# Altium PCB BU01v1.2.PcbDoc
Units mil, origin at the board's own origin, x right, y up, seen from the top; angles counter-clockwise.
Board outline 1015 x 695 mil, 2 copper layers (Top Layer, Bottom Layer); 7 components, 21 nets, 49 pads, 3 vias.
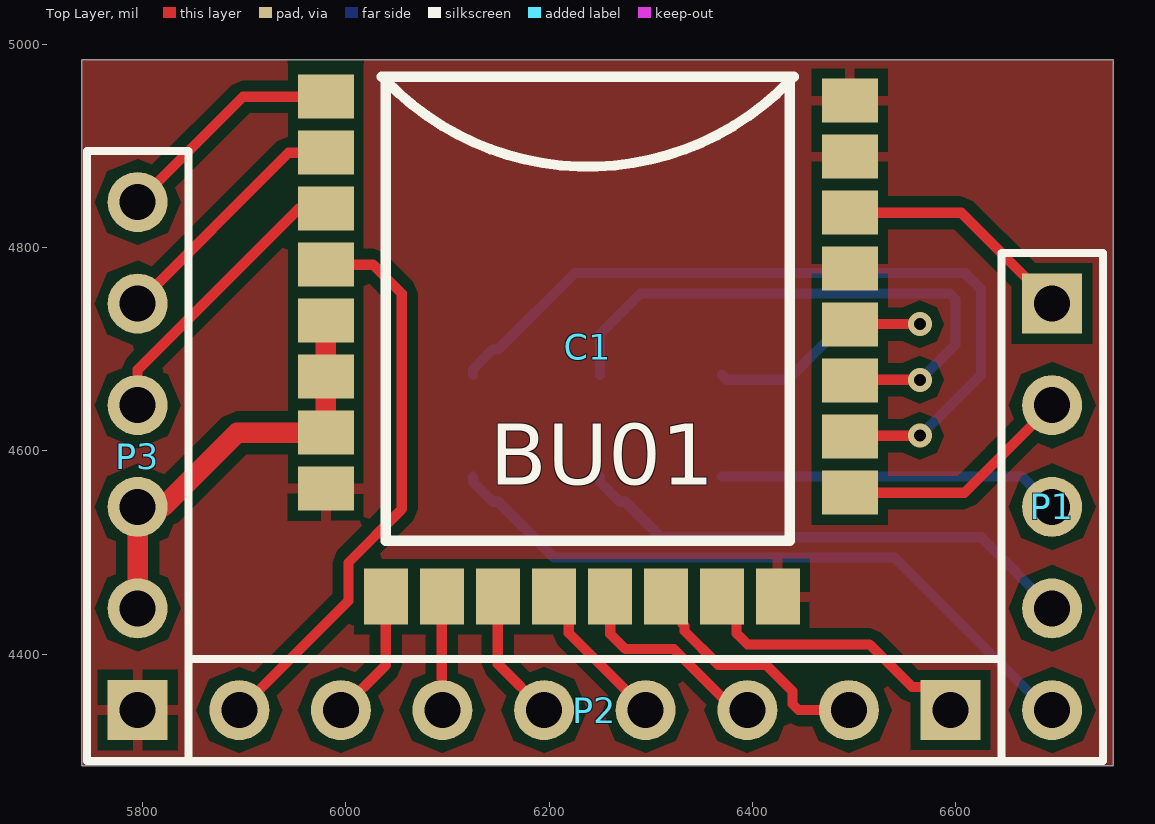
[diagram p0: Top Layer view]
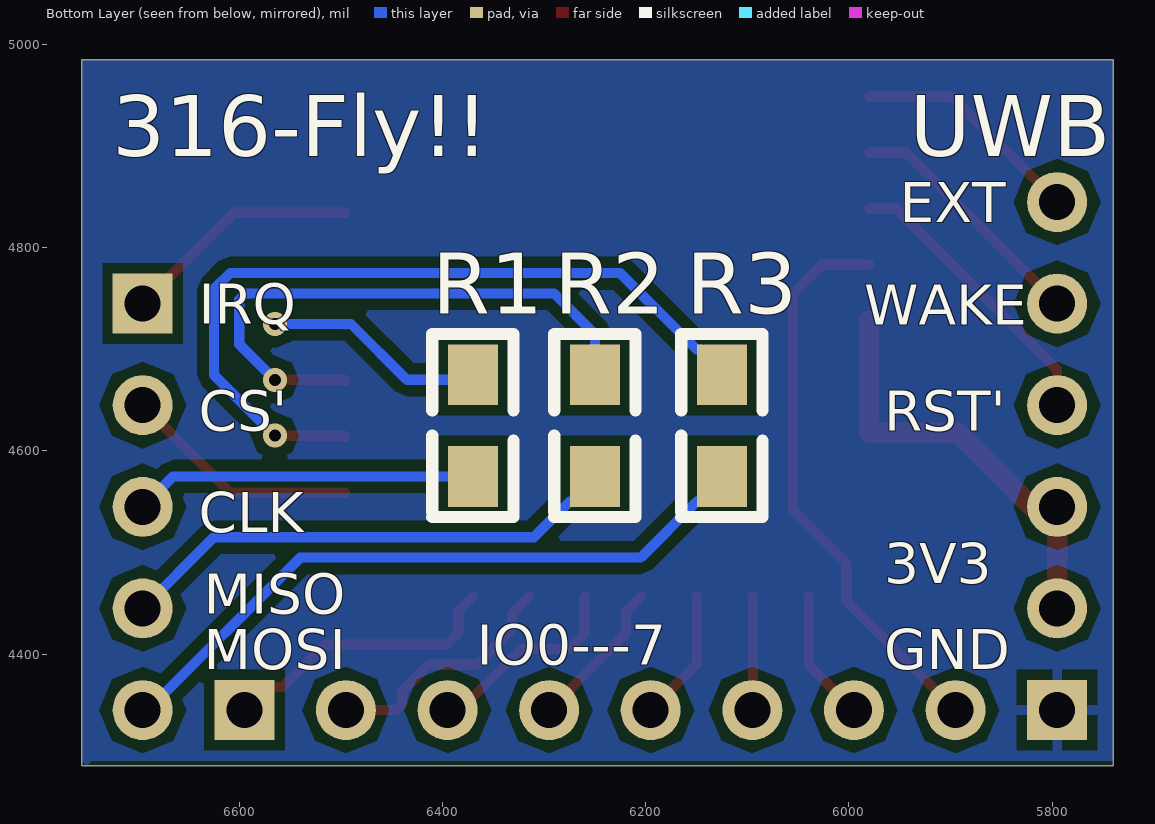
[diagram p1: Bottom Layer view, seen from below]

## Layer stack, top to bottom
Top Solder: solder mask 0.4, Solder Resist, Dk 3.5
Top Layer: signal copper 1.4
Dielectric 1: dielectric 12.6, FR-4, Dk 4.8
Bottom Layer: signal copper 1.4
Bottom Solder: solder mask 0.4, Solder Resist, Dk 3.5

## Board outline
5740,4290 5740,4985 6755,4985 6755,4290

## Design rules (kind name [scope] priority, off if disabled: settings)
Clearance [All] p1: gap=10
ComponentClearance [All] p1 off: gap=10 collisioncheckmode=3 verticalgap=10 showdistances=FALSE
PolygonConnect [All] p1: connectstyle=Relief reliefconductorwidth=10 reliefentries=4 polygonreliefangle="90 Angle" airgapwidth=10
RoutingVias [All] p1: holewidth=28 width=50 viastyle="Through Hole" minholewidth=28 minwidth=50 maxholewidth=28 maxwidth=50
SolderMaskExpansion [All] p1: expansion=4
Width [All] p1: maxlimit=30 minlimit=10 preferedwidth=10
29 further rules are at their usual default settings.

## Components (designator, comment, footprint, x,y, rotation, side; value= is the part's Value field where it differs from the comment)
C1 "BU01" BU01 6240,4925 r0 top
P1 "Header 5" HDR1X5 6695,4745 r270 top
P2 "Header 8" HDR1X8 6595,4345 r180 top
P3 "Header 6" HDR1X6 5795,4345 r90 top
R1 "Res Semi" 0805 6370,4675 r270 bottom
R2 "Res Semi" 0805 6250,4675 r270 bottom
R3 "Res Semi" 0805 6125,4675 r270 bottom

## Footprints (in the part's own frame and the unit in brackets; to place one, negate y for a bottom-side part, rotate by r counter-clockwise, add the part's x,y. Pads: shape width x height; smd on the part's side, far side on the other; paste and mask are expansions set on the pad)
0805 [mil]
  rect 60x49.21 smd: 1(0,0) 2(100,0)
  silkscreen extent -40,-40 140,40
BU01 [mm]
  rect 1.4x1.1 smd: 1(-6.6,0.6) 2(-6.6,-0.8) 3(-6.6,-2.2) 4(-6.6,-3.6) 5(-6.6,-5) 6(-6.6,-6.4) 7(-6.6,-7.8) 8(-6.6,-9.2) 17(6.5,-9.3) 18(6.5,-7.9) 19(6.5,-6.5) 20(6.5,-5.1) 21(6.5,-3.7) 22(6.5,-2.3) 23(6.5,-0.9) 24(6.5,0.5)
  rect 1.1x1.4 smd: 9(-5.1,-11.9) 10(-3.7,-11.9) 11(-2.3,-11.9) 12(-0.9,-11.9) 13(0.5,-11.9) 14(1.9,-11.9) 15(3.3,-11.9) 16(4.7,-11.9)
  silkscreen extent -5.2,-10.5 5.1,1.1
HDR1X5 [mm] "Connector; Header; 5 Position"
  rect 1.5x1.5 hole 0.9: 1(0,0)
  round 1.5 hole 0.9: 2(2.54,0) 3(5.08,0) 4(7.62,0) 5(10.16,0)
  silkscreen extent -1.27,-1.27 11.43,1.27
HDR1X6 [mm] "Connector; Header; 6 Position"
  rect 1.5x1.5 hole 0.9: 1(0,0)
  round 1.5 hole 0.9: 2(2.54,0) 3(5.08,0) 4(7.62,0) 5(10.16,0) 6(12.7,0)
  silkscreen extent -1.27,-1.27 13.97,1.27
HDR1X8 [mm] "Connector; Header; 8 Position"
  rect 1.5x1.5 hole 0.9: 1(0,0)
  round 1.5 hole 0.9: 2(2.54,0) 3(5.08,0) 4(7.62,0) 5(10.16,0) 6(12.7,0) 7(15.24,0) 8(17.78,0)
  silkscreen extent -1.27,-1.27 19.05,1.27

## Part data
P1: "Header, 5-Pin"
P2: "Header, 8-Pin"
P3: "Header, 6-Pin"
R1 R2 R3: "Semiconductor Resistor"

## Via types
v1: diameter 23.62, hole 11.81, Top Layer to Bottom Layer, 3 vias

## Nets (pads, with @x,y where several pads share a name; then routed paths per layer and width w, separated by ;. In a path a pad name is that pad's centre, name@x,y a point inside that pad or via, vN(x,y) a via of type N, cw(c..) or ccw(c..) an arc to the next point about the centre after c; other vN are vias at no path point)
3V3: C1.5 C1.6 C1.7 P3.2 P3.3 | length 425.6
  Top Layer w20: P3.2 P3.3 5820,4545 5892.91,4617.91 C1.7 C1.6 C1.5
CLK: C1.20 R1.1 | length 289.3
  Top Layer w10: C1.20 6496.6,4724.9 v1(6565,4724.9)
  Bottom Layer w10: R1.1 6375,4670 6435,4670 6490,4725 6564.9,4725 v1(6565,4724.9)
CS': C1.17 P1.2 | length 234.8
  Top Layer w10: C1.17 6608.86,4558.86 P1.2
EXTON: C1.1 P3.6 | length 228.1
  Top Layer w10: P3.6 5898.62,4948.62 C1.1
GND: C1.8 C1.16 C1.21 C1.23 C1.24 P3.1
IO0: C1.15 P2.1 | length 283.8
  Top Layer w10: C1.15 6384.43,4441.99 6384.43,4420.57 6395.47,4409.53 6515.47,4409.53 6557.37,4367.63 6572.37,4367.63 P2.1
IO1: C1.14 P2.2 | length 242.7
  Top Layer w10: C1.14 6331.46,4439.84 6331.46,4429.89 6333.27,4428.08 6333.27,4422.72 6366.46,4389.53 6413.44,4389.53 6439.53,4363.44 6439.53,4350.86 6445.39,4345 P2.2
IO2: C1.13 P2.3 | length 202.7
  Top Layer w10: C1.13 6260.21,4455.98 6260.21,4419.79 6275,4405 6322.71,4405 6382.71,4345 P2.3
IO3: C1.12 P2.4 | length 149
  Top Layer w10: C1.12 6219.25,4441.81 6219.25,4420.75 P2.4
IO4: C1.11 P2.5 | length 130.4
  Top Layer w10: C1.11 6149.45,4390.55 P2.5
IO5: C1.10 P2.6 | length 111.8
  Top Layer w10: C1.10 6094.33,4345.67 P2.6
IO6: C1.9 P2.7 | length 129.8
  Top Layer w10: P2.7 6039.21,4389.21 C1.9
IO7: C1.4 P2.8 | length 562.8
  Top Layer w10: P2.8 6002.56,4452.56 6002.56,4490.27 6055,4542.71 6055,4755 6026.73,4783.27 C1.4
IRQ: C1.22 P1.1 | length 236.1
  Top Layer w10: C1.22 6605.55,4834.45 P1.1
MISO: C1.19 R2.1 | length 572
  Top Layer w10: C1.19 6496.81,4670 v1(6565,4670)
  Bottom Layer w10: R2.1 6250,4714.9 6290.1,4755 6594.14,4755 6600,4749.14 6600,4705 v1(6565,4670)
MOSI: C1.18 R3.1 | length 789.7
  Top Layer w10: C1.18 6496.93,4615 v1(6565,4615)
  Bottom Layer w10: R3.1 6125,4680.39 6144.61,4700 6150,4700 6225,4775 6609.14,4775 6625,4759.14 6625,4675 v1(6565,4615)
NetP1_3: P1.3 R1.2 | length 337.4
  Bottom Layer w10: R1.2 6665,4575 P1.3
NetP1_4: P1.4 R2.2 | length 502
  Bottom Layer w10: R2.2 6250,4569.61 6269.61,4550 6275,4550 6310,4515 6625,4515 P1.4
NetP1_5: P1.5 R3.2 | length 668.4
  Bottom Layer w10: R3.2 6125,4569.61 6144.61,4550 6150,4550 6205,4495 6540,4495 6690,4345 P1.5
RST': C1.3 P3.4 | length 285.8
  Top Layer w10: P3.4 5795,4680 5953.39,4838.39 C1.3
WAKEUP: C1.2 P3.5 | length 246.7
  Top Layer w10: P3.5 5943.5,4893.5 C1.2

## Polygon pours and split planes (outlines as drawn)
GND on Top Layer "GND_L01_P002" (solid, pour order 2): 5740,4985 5740,4290 6755,4290 6755,4985
GND on Bottom Layer "GND_L02_P004" (solid, pour order 4): 5740,4985 5740,4295 6745,4295 6750,4290 6755,4295 6755,4985

## Silkscreen, mask and mechanical layers (free items; w line width, h text height)
Bottom Overlay:
  text "UWB" at 5940,4890 h60
  text "316-Fly!!" at 6725,4889.99 h60
  text "EXT" at 5950,4825 h39.37
  text "IRQ" at 6640,4725 h39.37
  text "WAKE" at 5985,4724.21 h39.37
  text "RST'" at 5965,4620 h39.37
  text "CS'" at 6640,4620 h39.37
  text "CLK" at 6640,4520 h39.37
  text "3V3" at 5965,4470 h39.37
  text "MISO" at 6635,4440 h39.37
  text "IO0---7" at 6366.46,4389.53 h39.37
  text "GND" at 5965,4385 h39.37
  text "MOSI" at 6635,4385 h39.37
Mechanical 1:
  the board outline again, w10